# Altium PCB FrontPanel.PcbDoc
Units mm, origin at the board's own origin, x right, y up, seen from the top; angles counter-clockwise.
Board outline 300 x 60 mm, 2 copper layers (Top Layer, Bottom Layer); 35 components, 35 nets, 101 pads, 0 vias.
Unrouted connection lines stored in the file: 46.
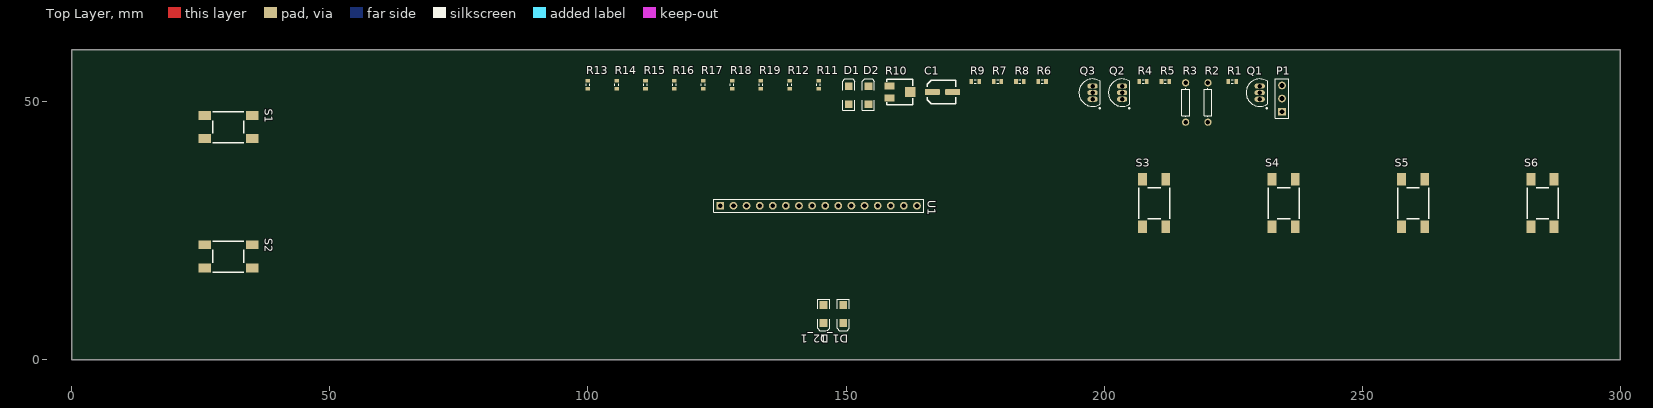
[diagram p0: Top Layer view]
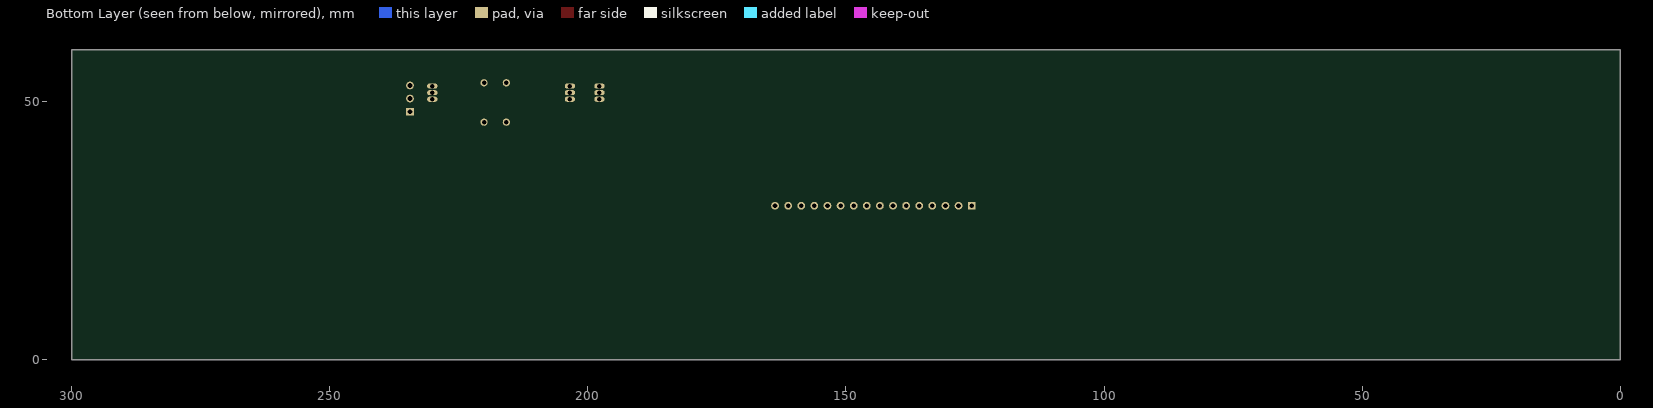
[diagram p1: Bottom Layer view, seen from below]

## Layer stack, top to bottom
Top Layer: signal copper 0.0356
Dielectric: dielectric 0.32, FR-4, Dk 4.8
Bottom Layer: signal copper 0.0356

## Board outline
0,0 300,0 300,60 0,60

## Design rules (kind name [scope] priority, off if disabled: settings)
Clearance [All] p1: gap=0.254
PolygonConnect [All] p1: connectstyle=Relief reliefconductorwidth=0.254 reliefentries=4 polygonreliefangle="90 Angle" airgapwidth=0.254
RoutingVias [All] p1: holewidth=0.711 width=1.27 viastyle="Through Hole" minholewidth=0.711 minwidth=1.27 maxholewidth=0.711 maxwidth=1.27
SilkscreenOverComponentPads [All] p1: minsilkscreentomaskgap=0.254
SolderMaskExpansion [All] p1: expansion=0.102
Width [All] p1: maxlimit=0.254 minlimit=0.254 preferedwidth=0.254
27 further rules are at their usual default settings.

## Classes and differential pairs
component class "Front Panel": C1 D1 D2 P1 Q1 Q2 Q3 R1 R2 R3 R4 R5 R6 R7 R8 R9 R10 R11 R12 R13 R14 R15 R16 R17 R18 R19 S1 S2 S3 S4 S5 S6 U1

## Components (designator, comment, footprint, x,y, rotation, side; value= is the part's Value field where it differs from the comment)
C1 "CAP" CAPAE430550 168.695,51.832 r0 top
D1 "Power" 3.2X1.6X1.1 150.534,51.197 r90 top
D1_1 "Power" 3.2X1.6X1.1 149.466,8.803 r270 top (schematic designator D1)
D2 "Standby" 3.2X1.6X1.1 154.344,51.197 r90 top
D2_1 "Standby" 3.2X1.6X1.1 145.656,8.803 r270 top (schematic designator D2)
P1 "IR Rx" HDR1X3 234.481,48.022 r90 top
Q1 "NPN" TO-226-AA 230.163,51.705 r0 top
Q2 "NPN" TO-226-AA 203.493,51.705 r0 top
Q3 "NPN" TO-226-AA 197.778,51.705 r0 top
R1 "Res3" J1-0603 224.829,53.864 r0 top
R2 "Res1" AXIAL-0.3 220.13,49.8 r90 top
R3 "Res1" AXIAL-0.3 215.812,49.8 r90 top
R4 "Res3" J1-0603 207.557,53.864 r0 top
R5 "Res3" J1-0603 211.875,53.864 r0 top
R6 "Res3" J1-0603 187.999,53.864 r0 top
R7 "Res3" J1-0603 179.363,53.864 r0 top
R8 "Res3" J1-0603 183.681,53.864 r0 top
R9 "Res3" J1-0603 175.045,53.864 r0 top
R10 "RPot SM" POT4MM-2 160.44,51.832 r0 top
R11 "Res3" J1-0603 144.692,53.229 r90 top
R12 "Res3" J1-0603 139.104,53.229 r90 top
R13 "Res3" J1-0603 99.988,53.229 r90 top
R14 "Res3" J1-0603 105.576,53.229 r90 top
R15 "Res3" J1-0603 111.164,53.229 r90 top
R16 "Res3" J1-0603 116.752,53.229 r90 top
R17 "Res3" J1-0603 122.34,53.229 r90 top
R18 "Res3" J1-0603 127.928,53.229 r90 top
R19 "Res3" J1-0603 133.516,53.229 r90 top
S1 "SW-PB" BUTTON_SMT_KPS-1105_HDSLDR 30.346,45.049 r0 top
S2 "SW-PB" BUTTON_SMT_KPS-1105_HDSLDR 30.346,19.969 r0 top
S3 "SW-PB" BUTTON_SMT_KPS-1105_HDSLDR 209.71,30.294 r90 top
S4 "SW-PB" BUTTON_SMT_KPS-1105_HDSLDR 234.79,30.294 r90 top
S5 "SW-PB" BUTTON_SMT_KPS-1105_HDSLDR 259.87,30.294 r90 top
S6 "SW-PB" BUTTON_SMT_KPS-1105_HDSLDR 284.95,30.294 r90 top
U1 "HD44780" HDR1X16 125.65,29.799 r0 top

## Footprints (in the part's own frame and the unit in brackets; to place one, negate y for a bottom-side part, rotate by r counter-clockwise, add the part's x,y. Pads: shape width x height; smd on the part's side, far side on the other; paste and mask are expansions set on the pad)
3.2X1.6X1.1 [mm] "SMT LED; 2 Flat Leads"
  rect 1.5x1.5 smd: 1(-1.75,0) 2(1.75,0)
  silkscreen extent -2.9,-1.15 3.2,1.15
AXIAL-0.3 [mm] "Axial Device, Thru-Hole; 2 Leads; 0.3 in Pin Spacing"
  round 1.4 hole 0.85: 1(-3.81,0) 2(3.81,0)
  silkscreen extent -2.77,-0.76 2.77,0.76
BUTTON_SMT_KPS-1105_HDSLDR [mm] "Switch tactile push button"
  rect 2.4x1.7 smd: 1(-4.6,2.25) 2(4.6,2.25) 3(-4.6,-2.25) 4(4.6,-2.25)
  silkscreen extent -3,-3.05 3,2.95, body extent -4.5,-3 4.5,3, height 4.35
CAPAE430550 [mm] "Case B, D = 4.0mm, 4.3 x 4.3 x 5.5"
  rrect20% 2.9x1.1 smd: 1(-1.95,0) 2(1.95,0)
  silkscreen extent -2.95,-2.25 2.55,2.25, body extent -2.58,-2.17 2.42,2.13, height 5.4
HDR1X3 [mm] "Connector; Header; 3 Position"
  rect 1.5x1.5 hole 0.9: 1(0,0)
  round 1.5 hole 0.9: 2(2.54,0) 3(5.08,0)
  silkscreen extent -1.27,-1.27 6.35,1.27
HDR1X16 [mm] "Connector; Header; 16 Position"
  rect 1.5x1.5 hole 0.9: 1(0,0)
  round 1.5 hole 0.9: 2(2.54,0) 3(5.08,0) 4(7.62,0) 5(10.16,0) 6(12.7,0) 7(15.24,0) 8(17.78,0) 9(20.32,0) 10(22.86,0) 11(25.4,0) 12(27.94,0) 13(30.48,0) 14(33.02,0) 15(35.56,0) 16(38.1,0)
  silkscreen extent -1.27,-1.27 39.37,1.27
J1-0603 [mm] "Chip Resistor, Body 1.6x0.8mm, IPC High Density"
  rect 0.7x0.9 smd: 1(-0.75,0) 2(0.75,0)
  silkscreen extent -0.2,-0.35 0.2,0.35, body extent -0.85,-0.48 0.85,0.48, height 0.9
POT4MM-2 [mm] "Square Trimming Potentiometer"
  rect 2x1.3 smd: CCW(-2,-1.15) CW(-2,1.15)
  rect 2x2 smd: W(2,0)
  silkscreen extent -2.5,-2.5 2.5,2.5
TO-226-AA [mm] "TO, Flat Index; 3 In-Line, Axial Leads; Body Dia. 4.8mm; Leads 0.55 x 0.51 mm (max)"
  oval 2x1 hole 0.9: 1(0,-1.27) 2(0,0) 3(0,1.27)
  silkscreen extent -2.65,-3.13 1.52,2.65, body extent -2.66,-2.66 1.52,2.66, height 5.33

## Part data
C1: library part CAP_ELECTRO, "Capacitor Electrolytic Aluminium"
D1 D1_1 D2 D2_1: library part LED2, "Typical RED, GREEN, YELLOW, AMBER GaAs LED"
P1: library part "Header 3", "Header, 3-Pin"
Q1 Q2 Q3: "NPN Bipolar Transistor"
R1 R2 R3 R4 R5 R6 R7 R8 R9 R11 R12 R13 R14 R15 R16 R17 R18 R19: "Resistor"
R10: "Square Trimming Potentiometer"
S1 S2 S3 S4 S5 S6: "Switch"

## Nets (pads, with @x,y where several pads share a name; then routed paths per layer and width w, separated by ;. In a path a pad name is that pad's centre, name@x,y a point inside that pad or via, vN(x,y) a via of type N, cw(c..) or ccw(c..) an arc to the next point about the centre after c; other vN are vias at no path point)
A: R2.1
B: R3.1
BTN_1: R19.1
BTN_2: C1.2 D1.2 D2.2 P1.1 Q1.3 R11.2 S1.1 S2.1 S3.1 S4.1 S5.1 S6.1 U1.1
NetD1_1: D1.1 R7.1
NetD2_1: D2.1 R8.1
NetP1_3: P1.3
NetP3_5: U1.4
NetP3_6: U1.5
NetP3_7: U1.6
NetP3_8: U1.11
NetP3_9: U1.12
NetP3_10: U1.13
NetP3_11: U1.14
NetP3_12: R1.1
NetP3_13: R4.2
NetP3_14: R5.2
NetQ1_1: Q1.1 U1.16
NetQ1_2: Q1.2 R1.2
NetQ2_2: Q2.2 R4.1
NetQ2_3: Q2.3 R7.2
NetQ3_2: Q3.2 R5.1
NetQ3_3: Q3.3 R8.2
NetR6_2: R6.2 U1.15
NetR9_2: R9.2 R10.CW
NetR10_CCW: R10.CCW R11.1
NetR10_W: R10.W U1.2
NetR12_1: R12.1 R13.1
NetR13_2: R13.2 R14.2 S1.2
NetR14_1: R14.1 R15.2 S2.2
NetR15_1: R15.1 R16.2 S3.2
NetR16_1: R16.1 R17.2 S4.2
NetR17_1: R17.1 R18.2 S5.2
NetR18_1: R18.1 R19.2 S6.2
VCC: C1.1 P1.2 Q2.1 Q3.1 R2.2 R3.2 R6.1 R9.1 R12.2 U1.3
pads on no net: D1_1.1 D1_1.2 D2_1.1 D2_1.2 S1.3 S1.4 S2.3 S2.4 S3.3 S3.4 S4.3 S4.4 S5.3 S5.4 S6.3 S6.4 U1.7 U1.8 U1.9 U1.10

## Silkscreen, mask and mechanical layers (free items; w line width, h text height)
PCB Outline:
  the board outline again, w0.2